# EAGLE board PLCC_IC_AND_ SOCKET (EAGLE 4.09)

Size 160 x 100 mm. Coordinates in mm from the lower left corner, seen from the top.
Outline: 0,0 160,0 160,100 0,100 0,0
Copper layers used: 

## Footprints (pad centres in the part's own frame; a part is rotated, then mirrored left to right if it is on the bottom)
S20 = drill 0.813 round: 1 0,5.08 | drill 0.813 octagon: 2 0,2.54; 3 -2.54,5.08; 4 -5.08,2.54; 5 -2.54,2.54; 6 -5.08,0; 7 -2.54,0; 8 -5.08,-2.54; 9 -2.54,-5.08; 10 -2.54,-2.54; 11 0,-5.08; 12 0,-2.54; 13 2.54,-5.08; 14 5.08,-2.54; 15 2.54,-2.54; 16 5.08,0; 17 2.54,0; 18 5.08,2.54; 19 2.54,5.08; 20 2.54,2.54
S28 = drill 0.813 round: 1 1.27,3.81 | drill 0.813 octagon: 2 -1.27,6.35; 3 -1.27,3.81; 4 -3.81,6.35; 5 -6.35,3.81; 6 -3.81,3.81; 7 -6.35,1.27; 8 -3.81,1.27; 9 -6.35,-1.27; 10 -3.81,-1.27; 11 -6.35,-3.81; 12 -3.81,-6.35; 13 -3.81,-3.81; 14 -1.27,-6.35; 15 -1.27,-3.81; 16 1.27,-6.35; 17 1.27,-3.81; 18 3.81,-6.35; 19 6.35,-3.81; 20 3.81,-3.81; 21 6.35,-1.27; 22 3.81,-1.27; 23 6.35,1.27; 24 3.81,1.27; 25 6.35,3.81; 26 3.81,6.35; 27 3.81,3.81; 28 1.27,6.35
S32 = drill 0.813 round: 1 1.27,5.08 | drill 0.813 octagon: 2 -1.27,7.62; 3 -1.27,5.08; 4 -3.81,7.62; 5 -6.35,5.08; 6 -3.81,5.08; 7 -6.35,2.54; 8 -3.81,2.54; 9 -6.35,0; 10 -3.81,0; 11 -6.35,-2.54; 12 -3.81,-2.54; 13 -6.35,-5.08; 14 -3.81,-7.62; 15 -3.81,-5.08; 16 -1.27,-7.62; 17 -1.27,-5.08; 18 1.27,-7.62; 19 1.27,-5.08; 20 3.81,-7.62; 21 6.35,-5.08; 22 3.81,-5.08; 23 6.35,-2.54; 24 3.81,-2.54; 25 6.35,0; 26 3.81,0; 27 6.35,2.54; 28 3.81,2.54; 29 6.35,5.08; 30 3.81,7.62; 31 3.81,5.08; 32 1.27,7.62
S44 = drill 0.813 round: 1 1.27,6.35 | drill 0.813 octagon: 2 -1.27,8.89; 3 -1.27,6.35; 4 -3.81,8.89; 5 -3.81,6.35; 6 -6.35,8.89; 7 -8.89,6.35; 8 -6.35,6.35; 9 -8.89,3.81; 10 -6.35,3.81; 11 -8.89,1.27; 12 -6.35,1.27; 13 -8.89,-1.27; 14 -6.35,-1.27; 15 -8.89,-3.81; 16 -6.35,-3.81; 17 -8.89,-6.35; 18 -6.35,-8.89; 19 -6.35,-6.35; 20 -3.81,-8.89; 21 -3.81,-6.35; 22 -1.27,-8.89; 23 -1.27,-6.35; 24 1.27,-8.89; 25 1.27,-6.35; 26 3.81,-8.89; 27 3.81,-6.35; 28 6.35,-8.89; 29 8.89,-6.35; 30 6.35,-6.35; 31 8.89,-3.81; 32 6.35,-3.81; 33 8.89,-1.27; 34 6.35,-1.27; 35 8.89,1.27; 36 6.35,1.27; 37 8.89,3.81; 38 6.35,3.81; 39 8.89,6.35; 40 6.35,8.89; 41 6.35,6.35; 42 3.81,8.89; 43 3.81,6.35; 44 1.27,8.89
S52 = drill 0.813 round: 1 0,10.16 | drill 0.813 octagon: 2 0,7.62; 3 -2.54,10.16; 4 -2.54,7.62; 5 -5.08,10.16; 6 -5.08,7.62; 7 -7.62,10.16; 8 -10.16,7.62; 9 -7.62,7.62; 10 -10.16,5.08; 11 -7.62,5.08; 12 -10.16,2.54; 13 -7.62,2.54; 14 -10.16,0; 15 -7.62,0; 16 -10.16,-2.54; 17 -7.62,-2.54; 18 -10.16,-5.08; 19 -7.62,-5.08; 20 -10.16,-7.62; 21 -7.62,-10.16; 22 -7.62,-7.62; 23 -5.08,-10.16; 24 -5.08,-7.62; 25 -2.54,-10.16; 26 -2.54,-7.62; 27 0,-10.16; 28 0,-7.62; 29 2.54,-10.16; 30 2.54,-7.62; 31 5.08,-10.16; 32 5.08,-7.62; 33 7.62,-10.16; 34 10.16,-7.62; 35 7.62,-7.62; 36 10.16,-5.08; 37 7.62,-5.08; 38 10.16,-2.54; 39 7.62,-2.54; 40 10.16,0; 41 7.62,0; 42 10.16,2.54; 43 7.62,2.54; 44 7.62,5.08; 45 10.16,5.08; 46 10.16,7.62; 47 7.62,10.16; 48 7.62,7.62; 49 5.08,10.16; 50 5.08,7.62; 51 2.54,10.16; 52 2.54,7.62
S68 = drill 0.813 round: 1 0,12.7 | drill 0.813 octagon: 2 0,10.16; 3 -2.54,12.7; 4 -2.54,10.16; 5 -5.08,12.7; 6 -5.08,10.16; 7 -7.62,12.7; 8 -7.62,10.16; 9 -10.16,12.7; 10 -12.7,10.16; 11 -10.16,10.16; 12 -12.7,7.62; 13 -10.16,7.62; 14 -12.7,5.08; 15 -10.16,5.08; 16 -12.7,2.54; 17 -10.16,2.54; 18 -12.7,0; 19 -10.16,0; 20 -12.7,-2.54; 21 -10.16,-2.54; 22 -12.7,-5.08; 23 -10.16,-5.08; 24 -12.7,-7.62; 25 -10.16,-7.62; 26 -12.7,-10.16; 27 -10.16,-12.7; 28 -10.16,-10.16; 29 -7.62,-12.7; 30 -7.62,-10.16; 31 -5.08,-12.7; 32 -5.08,-10.16; 33 -2.54,-12.7; 34 -2.54,-10.16; 35 0,-12.7; 36 0,-10.16; 37 2.54,-12.7; 38 2.54,-10.16; 39 5.08,-12.7; 40 5.08,-10.16; 41 7.62,-12.7; 42 7.62,-10.16; 43 10.16,-12.7; 44 12.7,-10.16; 45 10.16,-10.16; 46 12.7,-7.62; 47 10.16,-7.62; 48 12.7,-5.08; 49 10.16,-5.08; 50 12.7,-2.54; 51 10.16,-2.54; 52 12.7,0; 53 10.16,0; 54 12.7,2.54; 55 10.16,2.54; 56 12.7,5.08; 57 10.16,5.08; 58 12.7,7.62; 59 10.16,7.62; 60 12.7,10.16; 61 10.16,12.7; 62 10.16,10.16; 63 7.62,12.7; 64 7.62,10.16; 65 5.08,12.7; 66 5.08,10.16; 67 2.54,12.7; 68 2.54,10.16
S84 = drill 0.813 round: 1 0,15.24 | drill 0.813 octagon: 2 0,12.7; 3 -2.54,15.24; 4 -2.54,12.7; 5 -5.08,15.24; 6 -5.08,12.7; 7 -7.62,15.24; 8 -7.62,12.7; 9 -10.16,15.24; 10 -10.16,12.7; 11 -12.7,15.24; 12 -15.24,12.7; 13 -12.7,12.7; 14 -15.24,10.16; 15 -12.7,10.16; 16 -15.24,7.62; 17 -12.7,7.62; 18 -15.24,5.08; 19 -12.7,5.08; 20 -15.24,2.54; 21 -12.7,2.54; 22 -15.24,0; 23 -12.7,0; 24 -15.24,-2.54; 25 -12.7,-2.54; 26 -15.24,-5.08; 27 -12.7,-5.08; 28 -15.24,-7.62; 29 -12.7,-7.62; 30 -15.24,-10.16; 31 -12.7,-10.16; 32 -15.24,-12.7; 33 -12.7,-15.24; 34 -12.7,-12.7; 35 -10.16,-15.24; 36 -10.16,-12.7; 37 -7.62,-15.24; 38 -7.62,-12.7; 39 -5.08,-15.24; 40 -5.08,-12.7; 41 -2.54,-15.24; 42 -2.54,-12.7; 43 0,-15.24; 44 0,-12.7; 45 2.54,-15.24; 46 2.54,-12.7; 47 5.08,-15.24; 48 5.08,-12.7; 49 7.62,-15.24; 50 7.62,-12.7; 51 10.16,-15.24; 52 10.16,-12.7; 53 12.7,-15.24; 54 15.24,-12.7; 55 12.7,-12.7; 56 15.24,-10.16; 57 12.7,-10.16; 58 15.24,-7.62; 59 12.7,-7.62; 60 15.24,-5.08; 61 12.7,-5.08; 62 15.24,-2.54; 63 12.7,-2.54; 64 15.24,0; 65 12.7,0; 66 15.24,2.54; 67 12.7,2.54; 68 15.24,5.08; 69 12.7,5.08; 70 15.24,7.62; 71 12.7,7.62; 72 15.24,10.16; 73 12.7,10.16; 74 15.24,12.7; 75 12.7,15.24; 76 12.7,12.7; 77 10.16,15.24; 78 10.16,12.7; 79 7.62,15.24; 80 7.62,12.7; 81 5.08,15.24; 82 5.08,12.7; 83 2.54,15.24; 84 2.54,12.7
PLCC52 = smd 0.76 x 1.8: 1 0,9.13; 2 -1.27,9.13; 3 -2.54,9.13; 4 -3.81,9.13; 5 -5.08,9.13; 6 -6.35,9.13; 7 -7.62,9.13; 21 -7.62,-9.13; 22 -6.35,-9.13; 23 -5.08,-9.13; 24 -3.81,-9.13; 25 -2.54,-9.13; 26 -1.27,-9.13; 27 0,-9.13; 28 1.27,-9.13; 29 2.54,-9.13; 30 3.81,-9.13; 31 5.08,-9.13; 32 6.35,-9.13; 33 7.62,-9.13; 47 7.62,9.13; 48 6.35,9.13; 49 5.08,9.13; 50 3.81,9.13; 51 2.54,9.13; 52 1.27,9.13 | smd 1.8 x 0.76: 8 -9.13,7.62; 9 -9.13,6.35; 10 -9.13,5.08; 11 -9.13,3.81; 12 -9.13,2.54; 13 -9.13,1.27; 14 -9.13,0; 15 -9.13,-1.27; 16 -9.13,-2.54; 17 -9.13,-3.81; 18 -9.13,-5.08; 19 -9.13,-6.35; 20 -9.13,-7.62; 34 9.13,-7.62; 35 9.13,-6.35; 36 9.13,-5.08; 37 9.13,-3.81; 38 9.13,-2.54; 39 9.13,-1.27; 40 9.13,0; 41 9.13,1.27; 42 9.13,2.54; 43 9.13,3.81; 44 9.13,5.08; 45 9.13,6.35; 46 9.13,7.62
PLCC20 = smd 0.6 x 2.2: 1 0,4.3; 2 -1.27,4.3; 3 -2.54,4.3; 9 -2.54,-4.3; 10 -1.27,-4.3; 11 0,-4.3; 12 1.27,-4.3; 13 2.54,-4.3; 19 2.54,4.3; 20 1.27,4.3 | smd 2.2 x 0.6: 4 -4.3,2.54; 5 -4.3,1.27; 6 -4.3,0; 7 -4.3,-1.27; 8 -4.3,-2.54; 14 4.3,-2.54; 15 4.3,-1.27; 16 4.3,0; 17 4.3,1.27; 18 4.3,2.54
PLCC28 = smd 0.6 x 2.2: 1 0,5.6; 2 -1.27,5.6; 3 -2.54,5.6; 4 -3.81,5.6; 12 -3.81,-5.6; 13 -2.54,-5.6; 14 -1.27,-5.6; 15 0,-5.6; 16 1.27,-5.6; 17 2.54,-5.6; 18 3.81,-5.6; 26 3.81,5.6; 27 2.54,5.6; 28 1.27,5.6 | smd 2.2 x 0.6: 5 -5.6,3.81; 6 -5.6,2.54; 7 -5.6,1.27; 8 -5.6,0; 9 -5.6,-1.27; 10 -5.6,-2.54; 11 -5.6,-3.81; 19 5.6,-3.81; 20 5.6,-2.54; 21 5.6,-1.27; 22 5.6,0; 23 5.6,1.27; 24 5.6,2.54; 25 5.6,3.81
PLCC68 = smd 0.66 x 2.54: 1 0,12.192; 2 -1.27,12.192; 3 -2.54,12.192; 4 -3.81,12.192; 5 -5.08,12.192; 6 -6.35,12.192; 7 -7.62,12.192; 8 -8.89,12.192; 9 -10.16,12.192; 27 -10.16,-12.192; 28 -8.89,-12.192; 29 -7.62,-12.192; 30 -6.35,-12.192; 31 -5.08,-12.192; 32 -3.81,-12.192; 33 -2.54,-12.192; 34 -1.27,-12.192; 35 0,-12.192; 36 1.27,-12.192; 37 2.54,-12.192; 38 3.81,-12.192; 39 5.08,-12.192; 40 6.35,-12.192; 41 7.62,-12.192; 42 8.89,-12.192; 43 10.16,-12.192; 61 10.16,12.192; 62 8.89,12.192; 63 7.62,12.192; 64 6.35,12.192; 65 5.08,12.192; 66 3.81,12.192; 67 2.54,12.192; 68 1.27,12.192 | smd 2.54 x 0.66: 10 -12.192,10.16; 11 -12.192,8.89; 12 -12.192,7.62; 13 -12.192,6.35; 14 -12.192,5.08; 15 -12.192,3.81; 16 -12.192,2.54; 17 -12.192,1.27; 18 -12.192,0; 19 -12.192,-1.27; 20 -12.192,-2.54; 21 -12.192,-3.81; 22 -12.192,-5.08; 23 -12.192,-6.35; 24 -12.192,-7.62; 25 -12.192,-8.89; 26 -12.192,-10.16; 44 12.192,-10.16; 45 12.192,-8.89; 46 12.192,-7.62; 47 12.192,-6.35; 48 12.192,-5.08; 49 12.192,-3.81; 50 12.192,-2.54; 51 12.192,-1.27; 52 12.192,0; 53 12.192,1.27; 54 12.192,2.54; 55 12.192,3.81; 56 12.192,5.08; 57 12.192,6.35; 58 12.192,7.62; 59 12.192,8.89; 60 12.192,10.16
PLCC84 = smd 0.6 x 2.2: 1 0,14.5; 2 -1.27,14.5; 3 -2.54,14.5; 4 -3.81,14.5; 5 -5.08,14.5; 6 -6.35,14.5; 7 -7.62,14.5; 8 -8.89,14.5; 9 -10.16,14.5; 10 -11.43,14.5; 11 -12.7,14.5; 33 -12.7,-14.5; 34 -11.43,-14.5; 35 -10.16,-14.5; 36 -8.89,-14.5; 37 -7.62,-14.5; 38 -6.35,-14.5; 39 -5.08,-14.5; 40 -3.81,-14.5; 41 -2.54,-14.5; 42 -1.27,-14.5; 43 0,-14.5; 44 1.27,-14.5; 45 2.54,-14.5; 46 3.81,-14.5; 47 5.08,-14.5; 48 6.35,-14.5; 49 7.62,-14.5; 50 8.89,-14.5; 51 10.16,-14.5; 52 11.43,-14.5; 53 12.7,-14.5; 75 12.7,14.5; 76 11.43,14.5; 77 10.16,14.5; 78 8.89,14.5; 79 7.62,14.5; 80 6.35,14.5; 81 5.08,14.5; 82 3.81,14.5; 83 2.54,14.5; 84 1.27,14.5 | smd 2.2 x 0.6: 12 -14.5,12.7; 13 -14.5,11.43; 14 -14.5,10.16; 15 -14.5,8.89; 16 -14.5,7.62; 17 -14.5,6.35; 18 -14.5,5.08; 19 -14.5,3.81; 20 -14.5,2.54; 21 -14.5,1.27; 22 -14.5,0; 23 -14.5,-1.27; 24 -14.5,-2.54; 25 -14.5,-3.81; 26 -14.5,-5.08; 27 -14.5,-6.35; 28 -14.5,-7.62; 29 -14.5,-8.89; 30 -14.5,-10.16; 31 -14.5,-11.43; 32 -14.5,-12.7; 54 14.5,-12.7; 55 14.5,-11.43; 56 14.5,-10.16; 57 14.5,-8.89; 58 14.5,-7.62; 59 14.5,-6.35; 60 14.5,-5.08; 61 14.5,-3.81; 62 14.5,-2.54; 63 14.5,-1.27; 64 14.5,0; 65 14.5,1.27; 66 14.5,2.54; 67 14.5,3.81; 68 14.5,5.08; 69 14.5,6.35; 70 14.5,7.62; 71 14.5,8.89; 72 14.5,10.16; 73 14.5,11.43; 74 14.5,12.7
PLCC32R = smd 0.6 x 2.2: 1 0,6.9; 2 -1.27,6.9; 3 -2.54,6.9; 4 -3.81,6.9; 14 -3.81,-6.9; 15 -2.54,-6.9; 16 -1.27,-6.9; 17 0,-6.9; 18 1.27,-6.9; 19 2.54,-6.9; 20 3.81,-6.9; 30 3.81,6.9; 31 2.54,6.9; 32 1.27,6.9 | smd 2.2 x 0.6: 5 -5.7,5.08; 6 -5.7,3.81; 7 -5.7,2.54; 8 -5.7,1.27; 9 -5.7,0; 10 -5.7,-1.27; 11 -5.7,-2.54; 12 -5.7,-3.81; 13 -5.7,-5.08; 21 5.7,-5.08; 22 5.7,-3.81; 23 5.7,-2.54; 24 5.7,-1.27; 25 5.7,0; 26 5.7,1.27; 27 5.7,2.54; 28 5.7,3.81; 29 5.7,5.08
PLCC44 = smd 0.61 x 2.54: 1 0,8.382; 2 -1.27,8.382; 3 -2.54,8.382; 4 -3.81,8.382; 5 -5.08,8.382; 6 -6.35,8.382; 18 -6.35,-8.382; 19 -5.08,-8.382; 20 -3.81,-8.382; 21 -2.54,-8.382; 22 -1.27,-8.382; 23 0,-8.382; 24 1.27,-8.382; 25 2.54,-8.382; 26 3.81,-8.382; 27 5.08,-8.382; 28 6.35,-8.382; 40 6.35,8.382; 41 5.08,8.382; 42 3.81,8.382; 43 2.54,8.382; 44 1.27,8.382 | smd 2.54 x 0.61: 7 -8.382,6.35; 8 -8.382,5.08; 9 -8.382,3.81; 10 -8.382,2.54; 11 -8.382,1.27; 12 -8.382,0; 13 -8.382,-1.27; 14 -8.382,-2.54; 15 -8.382,-3.81; 16 -8.382,-5.08; 17 -8.382,-6.35; 29 8.382,-6.35; 30 8.382,-5.08; 31 8.382,-3.81; 32 8.382,-2.54; 33 8.382,-1.27; 34 8.382,0; 35 8.382,1.27; 36 8.382,2.54; 37 8.382,3.81; 38 8.382,5.08; 39 8.382,6.35

## Placement (x,y rotation side)
E$1  S20  [S20]  13.33,56.35 0 top
E$2  S28  [S28]  33.65,55.08 0 top
E$3  S32  [S32]  55.24,53.81 0 top
E$4  S44  [S44]  79.37,52.54 0 top
E$5  S52  [S52]  107.31,51.27 0 top
E$6  S68  [S68]  139.06,48.73 0 top
E$7  S84  [S84]  24.76,22.06 0 top
E$8  PLCC52  [PLCC52]  107.31,81.75 0 top
E$33  PLCC20  [PLCC20]  13.33,76.67 0 top
E$34  PLCC28  [PLCC28]  33.65,77.94 0 top
E$37  PLCC68  [PLCC68]  139.06,84.29 0 top
E$38  PLCC84  [PLCC84]  61.59,22.06 0 top
E$39  PLCC32R  [PLCC32R]  55.24,79.21 0 top
E$41  PLCC44  [PLCC44]  79.37,80.48 0 top

## Library data of the parts
E$1-E$7 = plcc-socket
E$8 = micro-mc68000
E$33 E$34 E$37 = 74xx-us
E$38 = altera
E$39 = atmel
E$41 = maxim